# Altium PCB VoltageIndicator_V3.PcbDoc
Units mm, origin at the board's own origin, x right, y up, seen from the top; angles counter-clockwise.
Board outline 100 x 58.17 mm, 2 copper layers (Top Layer, Bottom Layer); 59 components, 37 nets, 147 pads, 15 vias.
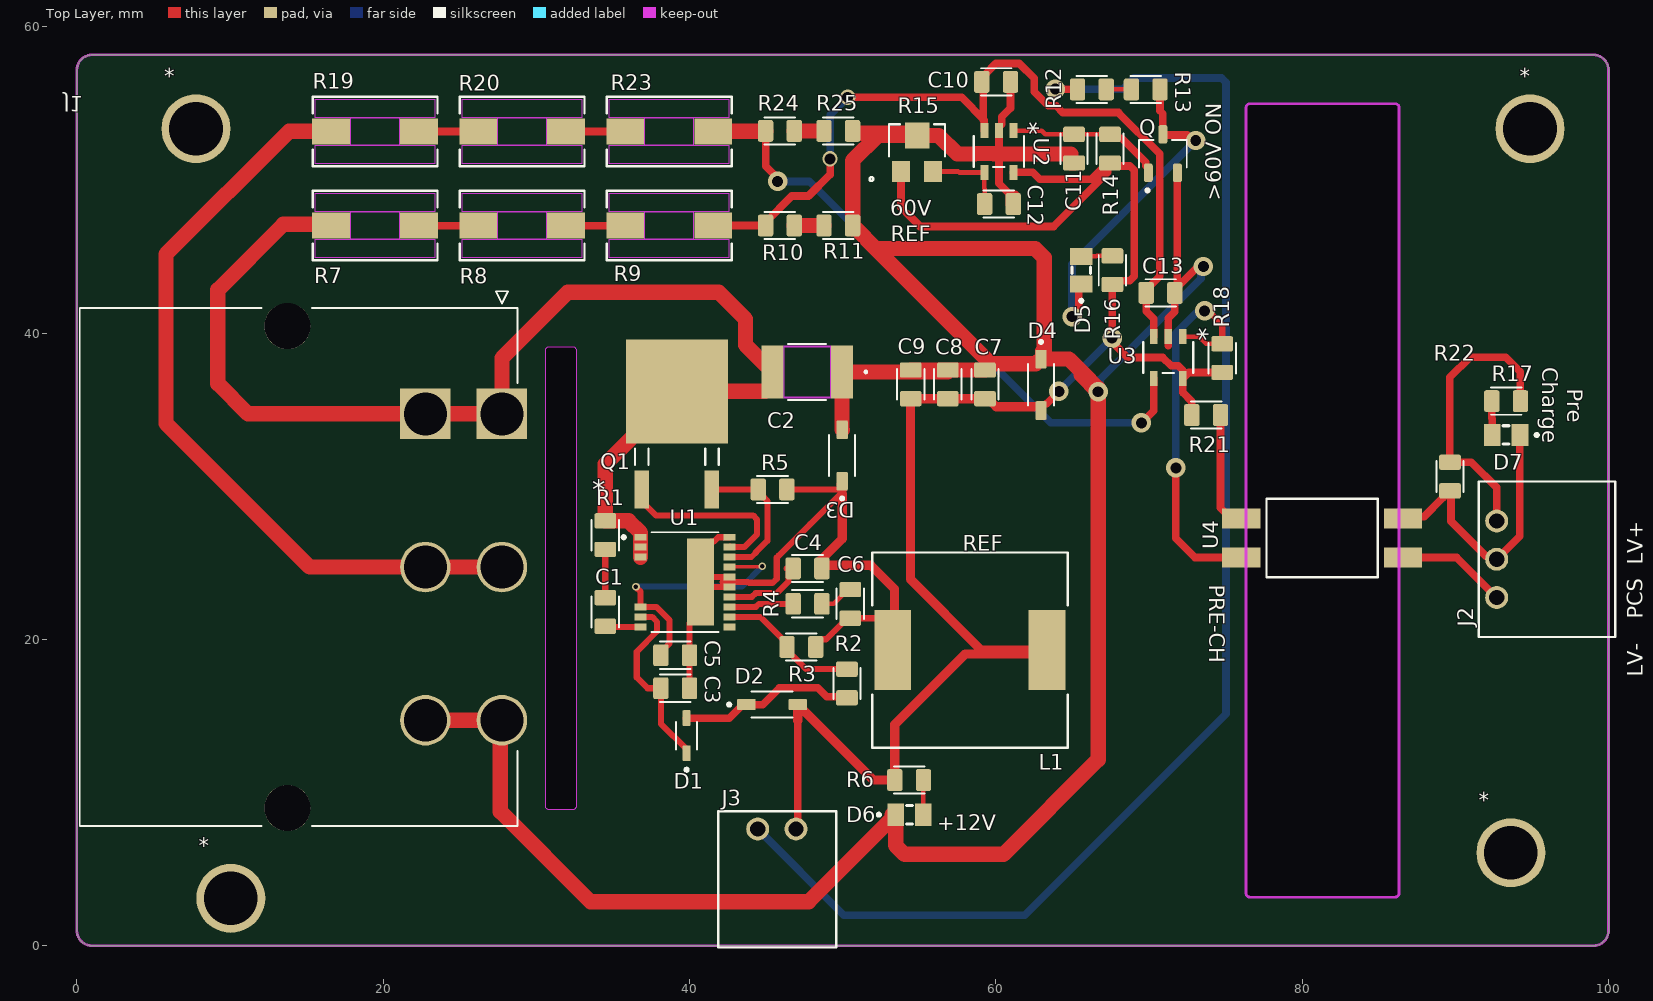
[diagram p0: Top Layer view]
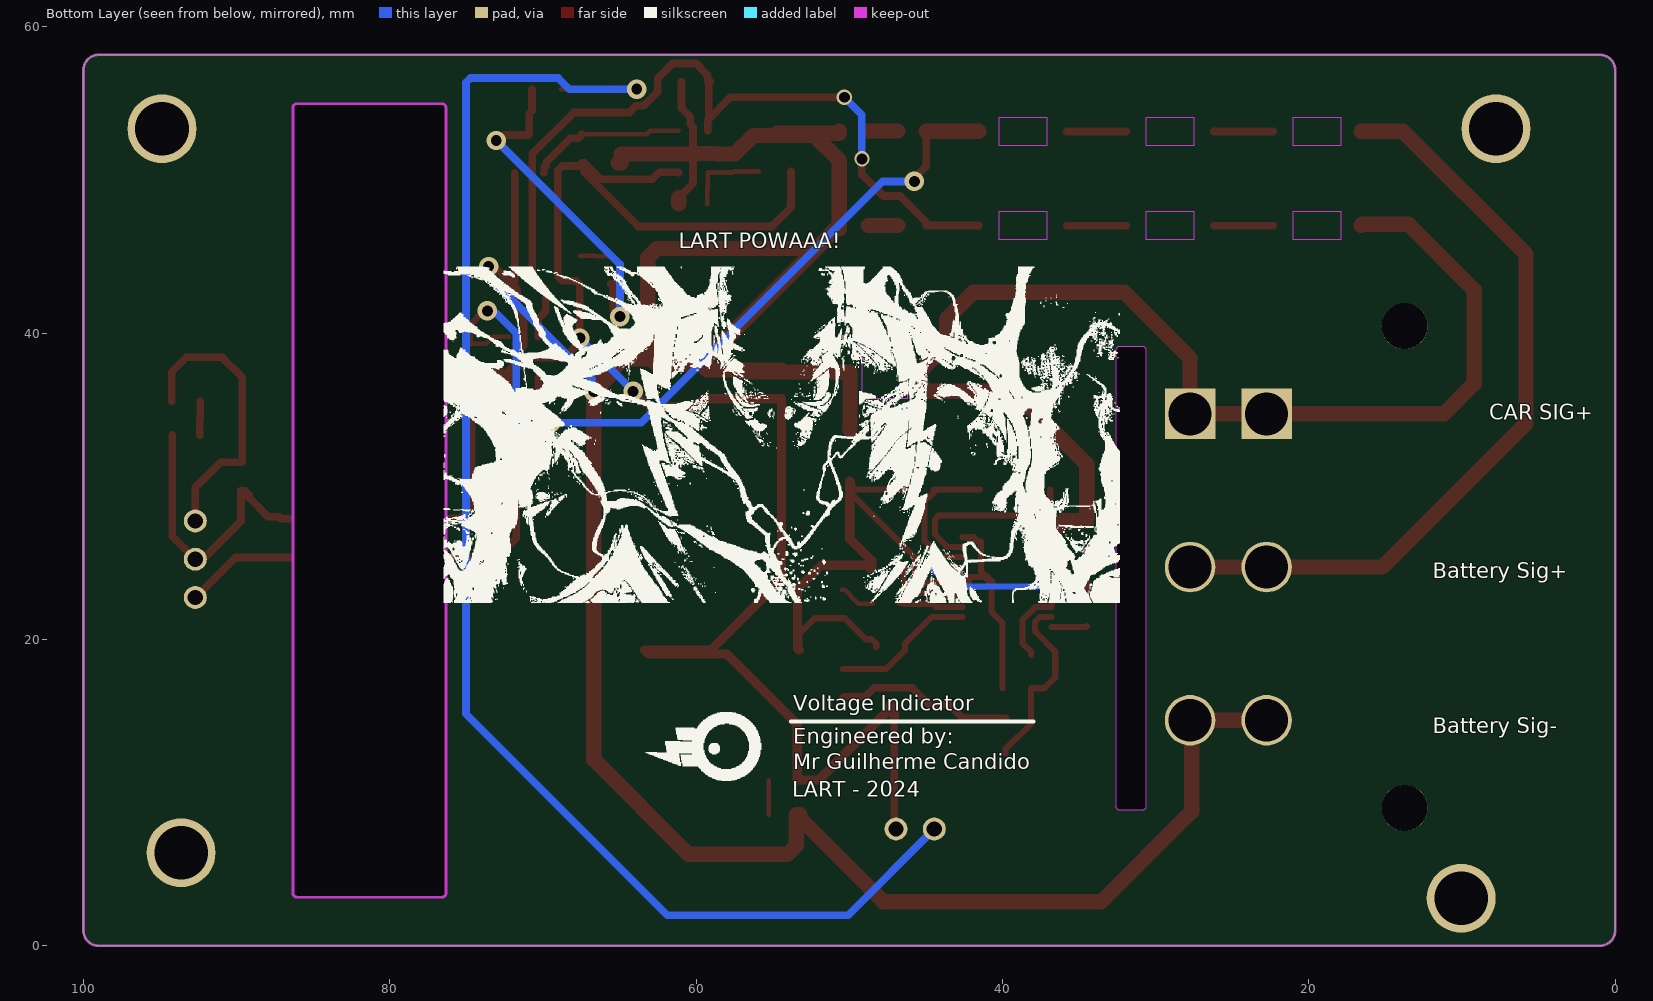
[diagram p1: Bottom Layer view, seen from below]
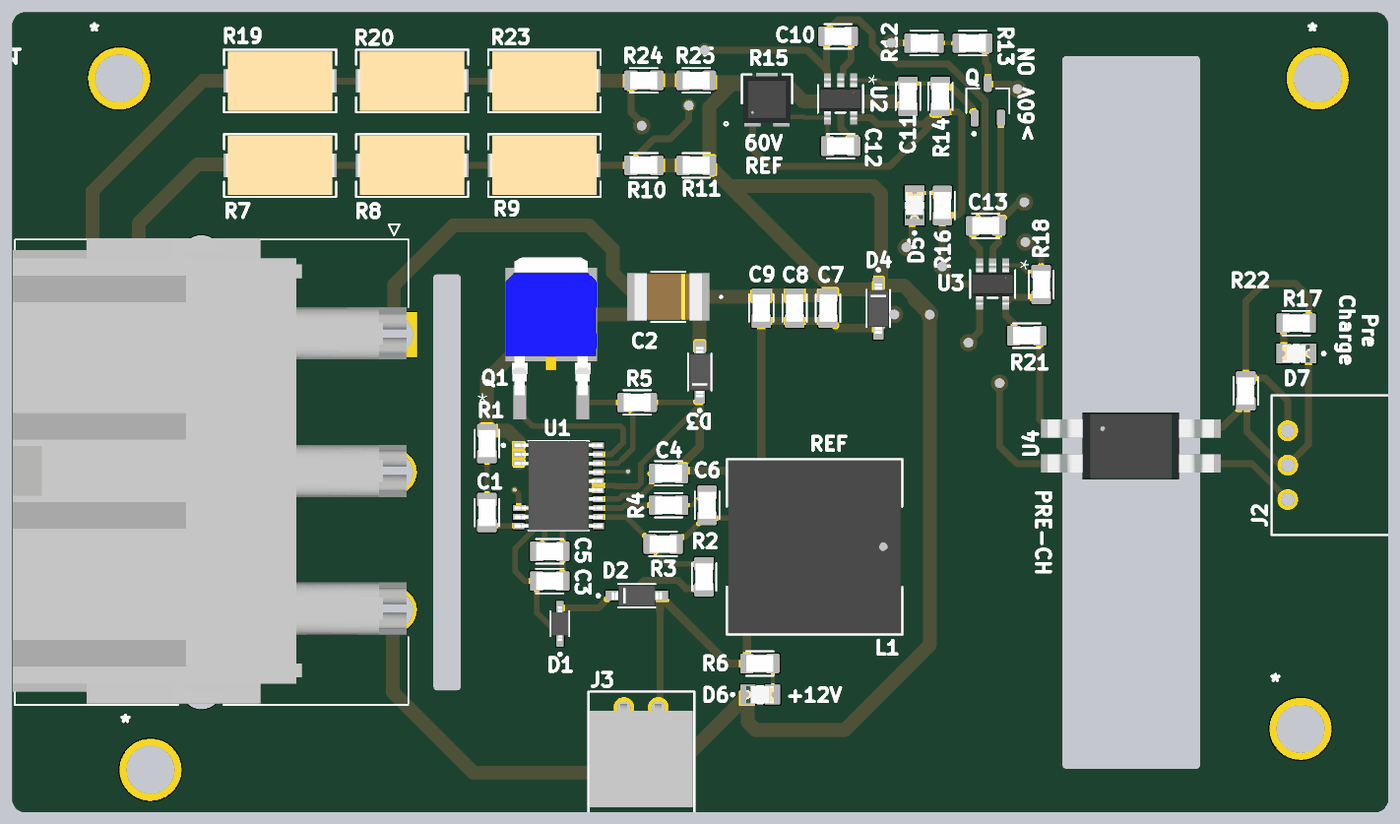
[diagram p2: 3D render of the assembled board from above, using the file's embedded part models]

## Layer stack, top to bottom
Top Solder: solder mask 0.0102, Solder Resist, Dk 3.5
Top Layer: signal copper 0.0356
Dielectric 1: dielectric 0.32, FR-4, Dk 4.8
Bottom Layer: signal copper 0.0356
Bottom Solder: solder mask 0.0102, Solder Resist, Dk 3.5

## Board outline
0,1 0,57.166 cw(c1,57.166) 1,58.166 99,58.166 cw(c99,57.166) 100,57.166 100,1 cw(c99,1) 99,0 1,0 cw(c1,1)
cut-out: 76.325,3.429 76.325,54.721 cw(c76.579,54.721) 76.579,54.975 86.071,54.975 cw(c86.071,54.721) 86.325,54.721 86.325,3.429 cw(c86.071,3.429) 86.071,3.175 76.579,3.175 cw(c76.579,3.429)
cut-out: 30.6,9.125 30.6,38.867 cw(c30.854,38.867) 30.854,39.121 32.346,39.121 cw(c32.346,38.867) 32.6,38.867 32.6,9.125 cw(c32.346,9.125) 32.346,8.871 30.854,8.871 cw(c30.854,9.125)

## Design rules (kind name [scope] priority, off if disabled: settings)
Clearance [All] p1: gap=0.2 ignorepadtopadclearanceinfootprint=TRUE
HoleSize [All] p1: absolutevalues=TRUE maxlimit=6.3 minlimit=0.3 maxpercent=80.000 minpercent=20.000
HoleToHoleClearance [All] p1: gap=0.5 allowstackedmicrovias=TRUE
PolygonConnect [All] p1: connectstyle=Relief reliefconductorwidth=0.254 reliefentries=4 polygonreliefangle="90 Angle" airgapwidth=0.254
RoutingVias [All] p1: holewidth=0.711 width=1.27 viastyle="Through Hole" minholewidth=0.3 minwidth=0.5 maxholewidth=6.3 maxwidth=10
SilkToSilkClearance [All] p1: silktosilkclearance=0
SolderMaskExpansion [All] p1: expansion=0.102 istentingtop=FALSE
UnRoutedNet [All] p1: checkbadconnections=TRUE
Width [All] p1: maxlimit=5 minlimit=0.127 preferedwidth=0.5 minimp=50.000000 maximp=50.000000 favimp=50.000000
26 further rules are at their usual default settings.

## Classes and differential pairs
component class "Pre-Charge Detector": C13 D7 R17 R18 R19 R20 R21 R22 R23 R24 R25 U3 U4
component class Connectors: J1 J2 J3
component class Buck: * C1 C2 C3 C4 C5 C6 C7 C8 C9 D1 D2 D3 D4 D6 L1 Q1 R1 R2 R3 R4 R5 R6 U1
component class 60V_Detector: C10 C11 C12 D5 Q R7 R8 R9 R10 R11 R12 R13 R14 R15 R16 U2

## Components (designator, comment, footprint, x,y, rotation, side; value= is the part's Value field where it differs from the comment)
* "M3 Mounting Hole" "M3 - Mounting Hole"#1 6.253,53.34 r0 top
* "M3 Mounting Hole" "M3 - Mounting Hole"#2 9.949,3.1 r0 top
* "M3 Mounting Hole" "M3 - Mounting Hole"#3 85,50.225 r0 top
* "M3 Mounting Hole" "M3 - Mounting Hole"#4 94.565,6.075 r0 top
C1 "10pF 630VDC" 0805 34.5,21.793 r270 top
C2 "0.1uF 630VDC" 1812 47.679,37.465 r180 top
C3 "10uF 25V" 0805 39.063,16.815 r0 top
C4 "0.1uF" 0805 47.703,24.638 r180 top
C5 "10uF 25V" 0805 39.063,18.974 r0 top
C6 "0.1uF" 0805 50.498,22.322 r90 top
C7 "47uF" 0805 59.287,36.652 r270 top
C8 "47uF" 0805 56.861,36.652 r270 top
C9 "47uF" 0805 54.435,36.652 r270 top
C10 "10uF" 0805 60.015,56.4 r180 top
C11 "10uF" 0805 65.1,52.04 r90 top
C12 "0805_Capacitor" 0805 60.2,48.425 r180 top
C13 "10uF" 0805 70.75,42.625 r180 top
D1 "CMDSH-3TR" SOD-323 39.805,13.716 r90 top
D2 "US1KFA" SOD123 45.389,15.748 r0 top
D3 "US1KFA" SOD123 49.965,32.004 r90 top
D4 "13V" SOD123 62.944,36.627 r270 top
D5 "LED 0805" "LED 0805" 65.573,44.109 r90 top
D6 "LED 0805" "LED 0805" 54.359,8.56 r0 top
D7 "LED 0805" "LED 0805" 93.309,33.35 r180 top
J1 "Molex 42820-3213" MOLEX_428203213 27.75,34.725 r90 top
J2 "S3B-XH-A(LF)(SN)" "3P JST XH2.54mm 90º" 92.695,27.737 r270 top
J3 "S2B-XH-A-1(LF)(SN)" "2P JST XH2.54mm 90º" 44.45,7.625 r0 top
L1 "7447709102 - WURTH" "7447709102 - WURTH" 58.309,19.304 r180 top
Q "N-MOS" AO3402 70.9,51.72 r90 top
Q1 "N-MOS" "DPAK - MOSFET" 39.17,36.195 r0 top
R1 "10k" 0805 34.5,26.81 r270 top
R2 "21.5k" 0805 50.275,17.125 r270 top
R3 "2.49k" 0805 47.303,19.507 r0 top
R4 "22.1k" 0805 47.703,22.327 r0 top
R5 "220mR" 0805 45.418,29.794 r180 top
R6 "10k" 0805 54.334,10.82 r180 top
R7 "SMV1W390KJT" SMV1W390KJT 19.468,47.02 r180 top
R8 "SMV1W390KJT" SMV1W390KJT 29.069,47.02 r180 top
R9 "SMV1W390KJT" SMV1W390KJT 38.67,47.019 r180 top
R10 "10K" 0805 45.9,47.025 r0 top
R11 "10K" 0805 49.71,47.025 r0 top
R12 "10K" 0805 66.267,55.91 r180 top
R13 "10K" 0805 69.782,55.91 r180 top
R14 "10K" 0805 67.45,52.04 r270 top
R15 "3203X502P" 3203X103P 54.85,51.805 r0 top
R16 "10k" 0805 67.605,44.109 r270 top
R17 "10k" 0805 93.309,35.56 r0 top
R18 "10K" 0805 74.775,38.365 r270 top
R19 "SMV1W390KJT" SMV1W390KJT 19.468,53.158 r180 top
R20 "SMV1W390KJT" SMV1W390KJT 29.069,53.158 r180 top
R21 "10K" 0805 73.725,34.65 r180 top
R22 "0805_Resistor" 0805 89.647,30.637 r90 top
R23 "SMV1W390KJT" SMV1W390KJT 38.67,53.158 r180 top
R24 "10K" 0805 45.9,53.2 r0 top
R25 "10K" 0805 49.71,53.2 r0 top
U1 "My_LT8316" IC_LT8316EFE#PBF 39.703,23.749 r0 top
U2 "MIC6270YM5-TR" MIC6270 60.2,51.85 r270 top
U3 "MIC6270YM5-TR" MIC6270 71.25,38.4 r270 top
U4 "VO617A-3X018T" VO617A 81.3,26.625 r0 top

## Footprints (in the part's own frame and the unit in brackets; to place one, negate y for a bottom-side part, rotate by r counter-clockwise, add the part's x,y. Pads: shape width x height; smd on the part's side, far side on the other; paste and mask are expansions set on the pad)
"2P JST XH2.54mm 90º" [mil]
  round 59 / inner round 60 / far side round 59 hole 39 paste-99999 mask+0: 1(0,0) 2(98.43,0)
  silkscreen extent -101,-304 202,46, body extent -98,-285 197,10, height 236
"3P JST XH2.54mm 90º" [mil]
  round 59 / inner round 60 / far side round 59 hole 39 paste-99999 mask+0: 1(0,0) 2(98.43,0) 3(196.86,0)
  silkscreen extent -101,-46 298,304, body extent -98,-10 295,285, height 236
0805 [mm]
  rrect25% 1x1.42 smd: 1(-0.935,0) 2(0.935,0)
  silkscreen extent -1,-0.89 1,0.89, body extent -1,-0.63 1,0.63, height 0.6
1812 [mil]
  rect 57x136 smd paste+0 mask+0: 1(-89.5,0) 2(89.5,0)
  Top Layer keep-out region: -59,-65 -59,65 59,65 59,-65
  Keep-Out Layer region: -59,-67 -59,67 59,67 59,-67
  silkscreen extent -154,-72 49,72, body extent -96,-67 96,67, height 86
3203X103P [mil]
  rect 47x55 smd paste+0 mask+0: 1(-41.34,-49.4) 2(41.34,-49.4)
  rect 63x67 smd paste+0 mask+0: 3(0,43.4)
  silkscreen extent -122,-74 72,72, body extent -67,-69 67,69, height 81
"7447709102 - WURTH" [mil] "1000uH - 900mA"
  rect 95x205 smd paste+0 mask+0: 1(-198.5,0) 2(198.5,0)
  silkscreen extent -251,-251 251,251, body extent -246,-246 246,246, height 394
AO3402 [mm]
  rrect50% 1.21x0.59 smd: 1(-1.255,0.95) 2(-1.255,-0.95) 3(1.255,0)
  silkscreen extent -2.5,-1.56 0.9,1.56
"DPAK - MOSFET" [mil]
  rect 37x98 smd paste+0 mask+0: 1(-90.16,-252) 2(90.16,-252)
  rect 262x268 smd paste+0 mask+0: 3(0,0)
  silkscreen extent -108,-189 108,-147, body extent -130,-231 130,163, height 93
IC_LT8316EFE#PBF [mm]
  rect 0.8x0.45 smd: 1(-2.9,2.925) 2(-2.9,2.275) 3(-2.9,1.625) 8(-2.9,-1.625) 9(-2.9,-2.275) 10(-2.9,-2.925) 11(2.9,-2.925) 12(2.9,-2.275) 13(2.9,-1.625) 14(2.9,-0.975) 15(2.9,-0.325) 16(2.9,0.325) 17(2.9,0.975) 18(2.9,1.625) 19(2.9,2.275) 20(2.9,2.925)
  rect 1.78x5.68 smd paste-4: 21(1.016,0)
  silkscreen extent -4.1,-3.25 2.2,3.25, body extent -3.2,-3.25 3.2,3.25, height 1.19
"LED 0805" [mm]
  rect 1.1x1.45 smd: A(0.9,0) C(-0.9,0)
  silkscreen extent -2.1,-0.6 0.2,0.6, body extent -1,-0.63 1,0.63, height 0.7
"M3 - Mounting Hole"#1 [mm]
  round 4.5 / inner round 1.524 / far side round 4.5 hole 3.5: 1(1.524,0)
"M3 - Mounting Hole"#2 [mm]
  round 4.5 / inner round 1.524 / far side round 4.5 hole 3.5: 1(0.101,0)
"M3 - Mounting Hole"#3 [mm]
  round 4.5 / inner round 1.524 / far side round 4.5 hole 3.5: 1(9.869,3.115)
"M3 - Mounting Hole"#4 [mm]
  round 4.5 / inner round 1.524 / far side round 4.5 hole 3.5: 1(-0.94,0)
MIC6270 [mil]
  rect 38.5x20 smd paste+0 mask+0: 1(-53.75,37.4) 2(-53.75,0) 3(-53.75,-37.4) 4(53.75,-37.4) 5(53.75,37.4)
  silkscreen extent -39,-65 40,64, body extent -59,-59 59,59, height 51
MOLEX_428203213 [mm]
  rect 3.3x3.3 / inner round 3.3 / far side rect 3.3x3.3 hole 2.8 mask+0.076: P1_1(0,0) P1_2(0,5)
  round 3.3 hole 2.8 mask+0.076: P2_1(-10,0) P2_2(-10,5) P3_1(-20,0) P3_2(-20,5)
  round 3 hole 3 unplated mask+0.076: ""(-25.73,14) ""(5.73,14)
  silkscreen extent -26.91,-1.03 8.01,27.56, body extent -26.82,-0.9 7,27.7, height 14.12
SMV1W390KJT [mil]
  rect 97x67 smd paste+0 mask+0: 1(-113,0) 2(113,0)
  Top Layer keep-out region: -153.5,-82.5 -153.5,-35.5 153.5,-35.5 153.5,-82.5
  Top Layer keep-out region: -153.5,35.5 -153.5,82.5 153.5,82.5 153.5,35.5
  Top Layer keep-out region: -62.5,-35.5 -62.5,35.5 62.5,35.5 62.5,-35.5
  Keep-Out Layer region: -62.5,-35.5 -62.5,35.5 62.5,35.5 62.5,-35.5
  silkscreen extent -160,-90 161,89, body extent -156,-84 156,84, height 152
SOD123 [mm]
  rrect18% 1.21x0.73 smd: 1(1.68,0) 2(-1.68,0)
  silkscreen extent -2.9,-0.85 1.35,0.85, body extent -1.83,-0.77 1.83,0.77, height 1.45
SOD-323 [mm]
  rrect25% 1.03x0.52 smd: A(1.15,0) C(-1.15,0)
  silkscreen extent -2.32,-0.68 0.9,0.68, body extent -1.24,-0.62 1.24,0.62, height 1.09
VO617A [mil]
  rect 98.43x52 smd paste+0 mask+0: 1(-208,50) 2(-208,-50) 3(208,-50) 4(208,50)
  silkscreen extent -143,-101 143,101, body extent -238,-96 238,96, height 163

## Part data
C1 C3 C4 C5 C6 C7 C8 C9 C10 C11 C13: library part 0805_Capacitor, Package="0805 AVX", Availability="In Stock", Check_prices=https://www.snapeda.com/parts/LD051A121KAB2A/AVX/view-part/?ref=eda, MF=AVX, MP=LD051A121KAB2A, Price=None, Purchase-URL=https://pricing.snapeda.com/search/part/LD051A121KAB2A/?ref=eda, SnapEDA_Link=https://www.snapeda.com/parts/LD051A121KAB2A/AVX/view-part/?ref=snap
C2: library part 1812_Capacitor, Package="0805 AVX", Availability="In Stock", Check_prices=https://www.snapeda.com/parts/LD051A121KAB2A/AVX/view-part/?ref=eda, MF=AVX, MP=LD051A121KAB2A, Price=None, Purchase-URL=https://pricing.snapeda.com/search/part/LD051A121KAB2A/?ref=eda, SnapEDA_Link=https://www.snapeda.com/parts/LD051A121KAB2A/AVX/view-part/?ref=snap
C12: Package="0805 AVX", Availability="In Stock", Check_prices=https://www.snapeda.com/parts/LD051A121KAB2A/AVX/view-part/?ref=eda, MF=AVX, MP=LD051A121KAB2A, Price=None, Purchase-URL=https://pricing.snapeda.com/search/part/LD051A121KAB2A/?ref=eda, SnapEDA_Link=https://www.snapeda.com/parts/LD051A121KAB2A/AVX/view-part/?ref=snap
D1: "Diode Schottky 30V 100mA Surface Mount SOD-323", Package="SOD-323 Central Semiconductor", Availability=Unavailable, MF="Central Semiconductor", MP="CMDSH-3 TR", Price=None, SnapEDA_Link=https://www.snapeda.com/parts/CMDSH-3%20TR/Central%20Semiconductor%20Corp/view-part/447234/?ref=snap
D2 D3: library part "SOD123 - Rectifier Diode", Package="SOD-123 Fairchild Semiconductor", Availability="In Stock", Check_prices=https://www.snapeda.com/parts/1N4148W-7-F/Diodes+Inc./view-part/?ref=eda, MF="Diodes Inc.", MP=1N4148W-7-F, Price=None, Purchase-URL=https://pricing.snapeda.com/search/part/1N4148W-7-F/?ref=eda, SnapEDA_Link=https://www.snapeda.com/parts/1N4148W-7-F/Diodes+Inc./view-part/?ref=snap
D4: library part "SOD123 - Zener Diode", Package="SMA-2 Taiwan Semiconductor", Availability="In Stock", Check_prices=https://www.snapeda.com/parts/1SMA5926/Taiwan+Semiconductor/view-part/?ref=eda, MF="Taiwan Semiconductor", MP=1SMA5926, Price=None, Purchase-URL=https://pricing.snapeda.com/search/part/1SMA5926/?ref=eda, SnapEDA_Link=https://www.snapeda.com/parts/1SMA5926/Taiwan+Semiconductor/view-part/?ref=snap
D5 D6 D7: "LED Uni-Color Green 4-Pin Chip 0805 T/R", Package=None, Availability=Unavailable, MP=597-3305-607F, Price=None
J1: Package=None, Availability=Unavailable, MP=428203213, Price=None
J2: library part "3P JST XH2.54mm 90º", "No Description Available", Mfr_Name=JST, Copyright="Copyright (C) 2024 Ultra Librarian. All rights reserved.", Manufacturer_Part_Number=S3B-XH-A(LF)(SN), RefDes=RefDes, Type=DEV
J3: library part "2P JST XH2.54mm 90º", "No Description Available", Mfr_Name=JST, Copyright="Copyright (C) 2024 Ultra Librarian. All rights reserved.", Manufacturer_Part_Number=S2B-XH-A-1(LF)(SN), RefDes=RefDes, Type=DEV
L1: "1000uH - 900mA", Package="Nonstandard Bourns", Digi-Key_Part_Number=SRR1260-680MCT-ND, Digi-Key_Purchase_URL=https://www.digikey.com/product-detail/en/bourns-inc/SRR1260-680M/SRR1260-680MCT-ND/2127423?utm_source=snapeda&utm_medium=aggregator&utm_campaign=symbol, MF=Bourns, MP=SRR1260-680M, SnapEDA_Link=https://www.snapeda.com/parts/SRR1260-680M/Bourns/view-part/337191/?ref=snap
Q Q1: "D-PAK", Package="SOT-23 Alpha &amp; Omega Semiconductor", Digi-Key_Part_Number=785-1002-1-ND, Digi-Key_Purchase_URL=https://www.digikey.ca/product-detail/en/alpha-omega-semiconductor-inc/AO3402/785-1002-1-ND/1855944?utm_source=snapeda&utm_medium=aggregator&utm_campaign=symbol, MF="Alpha &", MP=AO3402, SnapEDA_Link=https://www.snapeda.com/parts/AO3402/Alpha%20&%20Omega%20Semiconductor%20Inc./view-part/564857/?ref=snap
R1 R2 R3 R4 R5 R6 R10 R11 R12 R13 R14 R16 R17 R18 R21 R24 R25: library part 0805_Resistor, Package=0805, Power_Rating=".25 W", Resistance=.33, Tolerance=1%, Availability="In Stock", Check_prices=https://www.snapeda.com/parts/2-2176053-0/TE+Connectivity/view-part/?ref=eda, EU_RoHS_Compliance="Compliant with Exemptions", MF="TE Connectivity", MP=2-2176053-0, Price=None, SnapEDA_Link=https://www.snapeda.com/parts/2-2176053-0/TE+Connectivity/view-part/?ref=snap
R7 R8 R9 R19 R20 R22 R23: Package=0805, Power_Rating=".25 W", Resistance=.33, Tolerance=1%, Availability="In Stock", Check_prices=https://www.snapeda.com/parts/2-2176053-0/TE+Connectivity/view-part/?ref=eda, EU_RoHS_Compliance="Compliant with Exemptions", MF="TE Connectivity", MP=2-2176053-0, Price=None, SnapEDA_Link=https://www.snapeda.com/parts/2-2176053-0/TE+Connectivity/view-part/?ref=snap
R15: library part 3203X103P, "No Description Available", Mfr_Name="TE Connectivity", Copyright="Copyright (C) 2024 Ultra Librarian. All rights reserved.", Manufacturer_Part_Number=3203X502P, RefDes=RefDes, Type=DEV
U2 U3: "No Description Available", Mfr_Name=Microchip, Copyright="Copyright (C) 2024 Ultra Librarian. All rights reserved.", Manufacturer_Part_Number=MIC6270YM5-TR, RefDes=RefDes, Type=DEV
U4: library part VO617A, "VO617A-3X018T Optocoupler Dc-in 1-CH Transistor Dc-out 4-PIN PDIP SMD T/r", NexarPartId=68099910, Number of Channels=1

## Via types
v1: diameter 1.27, hole 0.711, Top Layer to Bottom Layer, tented both sides, 11 vias
v2: diameter 1, hole 0.711, Top Layer to Bottom Layer, tented both sides, 2 vias
v3: diameter 0.5, hole 0.3, Top Layer to Bottom Layer, tented both sides, 2 vias

## Nets (pads, with @x,y where several pads share a name; then routed paths per layer and width w, separated by ;. In a path a pad name is that pad's centre, name@x,y a point inside that pad or via, vN(x,y) a via of type N, cw(c..) or ccw(c..) an arc to the next point about the centre after c; other vN are vias at no path point)
+12: C7.2 C8.2 C9.2 D2.1 D4.1 J3.2 L1.1 R6.2 R14.2 R15.1 R16.2 R18.2 R21.2 U2.5 U3.5 | length 121.3
  Top Layer w0.3: D4.1 62.944,35.187 63.159,35.402 63.316,35.402
  Top Layer w0.5: J3.2 47.069,7.744 47.069,14.706 ; R15.1 53.8,48.209 55.045,46.965 63.779,46.965 67.31,50.495 R14.2@67.31,51.105 ; U2.5 61.15,50.495 62.408,50.495 62.865,50.038 66.243,50.038 R14.2@67.31,51.105 ; 63.316,35.402 v1(64.11,36.195) ; R21.2 72.79,35.535 72.2,36.125 U3.5 ; R18.2 72.595,37.43 U3.5 ; R14.2@67.31,51.105 R14.2 67.64,50.915 68.732,50.915 69.025,50.622 69.025,43.717 68.732,43.424 67.855,43.424 R16.2 67.589,43.174 v1(67.589,39.675) 67.589,39.421 68.605,38.405 70.901,38.405 71.448,37.858 71.907,37.858 72.2,37.566 U3.5
  Top Layer w0.6: 47.069,14.706 D2.1 47.309,15.748 47.374,15.683 47.374,15.443 51.997,10.82 R6.2 53.399,14.449 58,19.05 63.097,19.05 L1.1 59.046,19.304 54.425,23.925 54.425,35.717 C9.2 C8.2 C7.2 59.497,35.717 60.027,35.187 62.879,35.187 62.944,35.122 D4.1
  Bottom Layer w0.5: v1(64.11,36.195) v1(67.589,39.675)
GND: C2.1 C7.1 C8.1 C9.1 C10.1 C11.1 C12.1 C13.1 D3.1 D4.2 D6.C J1.P3_1 J1.P3_2 Q.2 R11.2 R15.3 R25.2 U2.2 U3.2 | length 198.7
  Top Layer w0.5: C10.1 60.95,54.675 60.392,54.117 60.392,53.642 60.2,53.45 U2.2 60.2,51.689 60.2,49.775 60.885,49.09 60.885,48.885 60.93,48.84 C12.1@61.135,48.84 ; 71.25,39.174 U3.2 71.25,40.97 71.685,41.405 C13.1 71.85,42.79 C13.1@71.85,43 ; C13.1@71.685,42.835 C13.1@71.85,43 ; Q.2 C13.1@71.85,43 ; v1(73.55,44.35) 73.364,44.164 73.014,44.164 C13.1@71.85,43
  Top Layer w1: J1.P3_2 J1.P3_1 27.65,14.625 27.65,8.757 33.532,2.875 47.774,2.875 53.234,8.335 53.234,8.56 D6.C 53.459,8.385 53.409,8.335 53.459,8.335 53.459,6.561 54.045,5.975 60.5,5.975 66.675,12.15 66.675,32.575 66.675,32.969 66.675,36.4 65.673,37.402 64.768,38.307 62.974,38.307 D4.2 63.049,38.412 63.049,38.827 63.15,38.928 63.15,44.939 62.564,45.525 54.012,45.525 52.145,45.525 ; D3.1 49.958,33.69 49.958,37.459 C2.1 54.435,37.465 C8.1@56.861,37.465 ; R25.2 50.645,53.053 54.704,53.053 R15.3 ; C9.1 C8.1 C7.1 59.7,38 62.607,38 D4.2@62.809,38.202 ; 59.363,38.307 52.145,45.525 ; C12.1 C12.1@61.135,48.84 ; C11.1 64.897,51.105 64.897,51.689 60.2,51.689 59.855,51.689 59.816,51.728 58.684,51.728 58.645,51.689 57.48,51.689 56.262,52.907 R15.3 ; 65.557,37.287 v1(66.675,36.17) ; 52.145,45.525 50.855,46.815 50.645,46.815 R11.2 50.645,51.257 52.295,52.907 R15.3
  Bottom Layer w0.5: v1(66.675,36.17) 66.802,36.297 66.802,36.977 73.395,43.57 73.395,44.195 v1(73.55,44.35)
INTVCC: C5.1 U1.8 U1.17 | length 17.2
  Top Layer w0.254: U1.17 42.629,24.75 44.725,24.75 v3(44.75,24.775)
  Top Layer w0.4: v3(36.5,23.45) 36.5,23.423 36.803,23.12 U1.8 37.826,22.124 38.7,21.25 38.7,19.755 38.128,19.184 C5.1
  Bottom Layer w0.4: v3(36.5,23.45) 43.425,23.45 v3(44.75,24.775)
"LV GND": J2.3 U4.3 | length 7.2
  Top Layer w0.5: U4.3@86.578,25.347 90.085,25.347 J2.3
NetC1_1: C1.1 R1.2 | length 3.1
  Top Layer w0.4: C1.1 R1.2
NetC1_2: C1.2 U1.10 | length 2.3
  Top Layer w0.4: C1.2 34.534,20.824 U1.10
NetC2_2: C2.2 J1.P1_1 J1.P1_2 Q1.3 R1.1 R7.2 U1.1 U1.2 U1.3 | length 82.8
  Top Layer w1: R7.2 16.517,47.1 13.475,47.1 9.2,42.825 9.2,36.7 11.175,34.725 J1.P1_2 J1.P1_1 27.75,38.375 32.05,42.675 41.9,42.675 43.65,40.925 43.65,39.22 C2.2 45.405,36.669 44.932,36.195 Q1.3 39.17,36.119 34.5,31.449 R1.1 36.03,27.745 36.803,26.972 U1.2 U1.3
NetC3_1: C3.1 D1.C U1.9 | length 12.2
  Top Layer w0.4: U1.9 37.551,21.474 37.876,21.149 37.876,20.526 36.551,19.201 36.551,17.524 37.26,16.815 C3.1 38.128,14.497 39.805,12.821 D1.C
NetC3_2: C3.2 C4.1 C5.2 C6.1 D3.2 L1.2 R3.2 R5.1 U1.15 U1.16 U1.20 U1.21 | length 57.3
  Top Layer w0.3: U1.16 42.15,24.074 42.15,23.75 43.806,23.75 45.415,23.75 45.689,24.024
  Top Layer w0.4: C3.2 C5.2 39.998,21.078 40.719,21.799 U1.21 41.044,23.424 U1.15 ; 42.15,23.75 43.806,23.75 43.877,23.679 45.416,23.679 45.689,23.952 45.689,25.339 45.814,25.463 47.883,27.532 49.965,29.614 ; U1.16 41.044,24.074 41.409,24.439 41.409,26.389 41.589,26.389 41.874,26.674 U1.20 ; R5.1 D3.2@49.675,29.794 ; R3.2 48.238,19.717 48.538,20.017 48.919,20.017 50.288,21.387 C6.1 52.26,21.387 53.267,20.38 L1.2 ; D3.2@49.8,29.849 49.8,30.159 D3.2
  Top Layer w0.5: U1.21 U1.21@41.044,24.074
  Top Layer w0.6: C4.1 48.538,24.738 48.538,25.148 49.965,26.575 49.965,29.518 ; C4.1@48.638,24.848 51.827,24.848 53.375,23.3 53.375,19.412 L1.2 ; D3.2@49.965,29.794 D3.2
NetC4_2: C4.2 U1.14 | length 5.7
  Top Layer w0.3: C4.2@46.368,24.638 C4.2
  Top Layer w0.4: U1.14 42.611,22.782 44.065,22.782 44.308,23.025 45.687,23.025 46.468,23.805 46.468,24.338 C4.2 ; C4.2@46.343,24.638 C4.2@46.368,24.638
NetC6_2: C6.2 R4.2 | length 2.5
  Top Layer w0.3: R4.2@48.463,22.327 R4.2 49.413,22.327 49.938,22.852 49.938,22.907 50.288,23.257 C6.2
NetC10_2: C10.2 C13.2 R9.1 R10.1 U2.3 U3.3 | length 55
  Top Layer w0.5: R9.1@41.571,47.05 R9.1 41.546,47.025 R10.1@44.831,47.025 ; R10.1 44.965,47.235 46.68,48.95 47.766,48.95 49.175,50.359 v2(49.175,51.375) ; v2(50.325,55.4) 57.757,55.4 59.25,53.907 U2.3 ; C10.2 59.165,56.315 59.165,53.907 ; C10.2@59.25,56.4 59.25,56.845 59.315,56.845 59.33,56.86 59.33,56.925 60.005,57.6 61.523,57.6 62.494,56.629 62.494,55.771 63.426,54.84 63.935,54.84 64.375,54.4 68.003,54.4 70.701,51.701 70.701,43.711 69.815,42.824 C13.2 69.815,41.43 70.3,40.945 U3.3
  Bottom Layer w0.5: v2(49.175,51.375) 49.175,54.25 v2(50.325,55.4)
NetC11_2: C11.2 Q.1 R14.1 U2.1 | length 10.3
  Top Layer w0.3: U2.1 62.992,53.215 63.232,52.975 C11.2 R14.1
  Top Layer w0.5: R14.1 67.7,52.725 68.225,52.725 69.792,51.158 69.792,50.933 69.905,50.82 69.905,50.51 Q.1
NetC12_2: C12.2 R15.2 U2.4 | length 5.4
  Top Layer w0.3: R15.2 57.531,50.55 57.596,50.485 U2.4 59.25,49.443 59.265,49.428 C12.2
NetD1_A: D1.A D2.2 R2.2 | length 12.1
  Top Layer w0.3: R2.2@50.065,16.19 R2.2 R2.2@50.425,16.19
  Top Layer w0.5: D1.A 42.587,14.866 43.469,15.748 D2.2 44.773,15.748 45.875,16.85 48.374,16.85 48.965,16.259 50.356,16.259 R2.2@50.425,16.19
NetD5_A: D5.A R16.1 | length 2
  Top Layer w0.3: D5.A 66.548,45.009 66.583,45.044 R16.1
NetD5_C: D5.C Q.3 R13.1 | length 22.7
  Top Layer w0.5: v1(64.973,41.072) 65.405,41.504 65.405,43.209 D5.C ; R13.1 70.717,54.514 70.9,54.331 Q.3 70.945,52.93 72.487,52.93 72.842,52.575 v1(73.05,52.575)
  Bottom Layer w0.5: v1(64.973,41.072) 64.973,44.498 v1(73.05,52.575)
NetD6_A: D6.A R6.1 | length 2.3
  Top Layer w0.3: D6.A 55.269,8.569 R6.1
NetD7_A: D7.A R17.1 | length 2.2
  Top Layer w0.5: R17.1 92.374,34.452 92.409,34.417 D7.A
NetD7_C: D7.C J2.2 R22.1 U4.4 | length 18.7
  Top Layer w0.5: U4.4@86.578,27.887 87.124,27.887 87.243,28.005 87.95,28.005 89.187,29.242 89.187,29.452 89.437,29.702 89.713,29.702 89.713,28.218 89.713,27.712 91.997,25.428 92.504,25.428 J2.2 94.209,26.751 D7.C
NetJ1_P2_1: J1.P2_1 J1.P2_2 R19.2 | length 51
  Top Layer w1: R19.2 16.58,53.175 13.85,53.175 5.825,45.15 5.825,34.1 15.2,24.725 J1.P2_2 J1.P2_1
NetJ2_1: J2.1 R17.2 R22.2 | length 18.9
  Top Layer w0.5: J2.1 92.695,29.921 91.044,31.572 R22.2 89.637,31.572 89.637,37.109 90.957,38.43 93.294,38.43 94.244,37.48 R17.2
NetJ3_1: J3.1 R12.2 | length 92.6
  Top Layer w0.5: v1(63.875,55.925) 63.883,55.917 65.324,55.917 R12.2
  Bottom Layer w0.5: J3.1 50.075,2 61.875,2 75.025,15.15 75.025,56.357 74.732,56.65 68.995,56.65 68.27,55.925 v1(63.875,55.925)
NetQ1_1: Q1.1 U1.19 | length 12
  Top Layer w0.4: Q1.1 36.88,29.019 37.804,28.096 44.145,28.096 44.4,27.841 44.4,26.85 43.574,26.024 U1.19 U1.19@42.632,26.053
NetQ1_2: Q1.2 R5.2 U1.18 | length 9.6
  Top Layer w0.35: 44,25.374 44.038,25.377 44.325,25.664
  Top Layer w0.4: Q1.2 44.325,29.794 R5.2 44.483,29.584 44.783,29.284 44.851,29.284 45.085,29.05 45.085,26.439 44.325,25.678 44.325,25.664 ; U1.18 44,25.374
NetR2_1: R2.1 R3.1 U1.12 | length 9.5
  Top Layer w0.4: U1.12 44.611,21.474 46.368,19.717 R3.1 46.368,19.297 47.605,18.06 R2.1 R2.1@50.425,18.06
NetR4_1: R4.1 U1.13 | length 4.2
  Top Layer w0.3: R4.1@46.368,22.327 R4.1
  Top Layer w0.4: U1.13 42.607,22.128 44.336,22.128 44.535,22.327 R4.1@46.368,22.327
NetR7_1: R7.1 R8.2 | length 3.9
  Top Layer w0.5: R7.1 R8.2
NetR8_1: R8.1 R9.2 | length 3.9
  Top Layer w0.5: R8.1@31.939,47.019 R9.2
NetR10_2: R10.2 R11.1 | length 1.9
  Top Layer w1: R10.2 R11.1
NetR12_1: R12.1 R13.2 | length 1.6
  Top Layer w0.3: R12.1 R13.2
NetR18_1: R18.1 U3.1 U4.2 | length 26.4
  Top Layer w0.3: U3.1 73.254,39.765 73.719,39.3 R18.1
  Top Layer w0.4: v1(73.625,41.45) 73.85,41.45 74.775,40.525 R18.1
  Top Layer w0.5: v1(71.75,31.2) 71.75,26.6 72.995,25.355 75.758,25.355 U4.2 ; U4.2@75.758,25.347 U4.2@76.012,25.347
  Bottom Layer w0.5: v1(71.75,31.2) 71.75,40 73.053,41.303 73.478,41.303 v1(73.625,41.45)
NetR19_1: R19.1 R20.2 | length 3.9
  Top Layer w0.5: R19.1 R20.2
NetR20_1: R20.1 R23.2 | length 3.9
  Top Layer w0.5: R20.1 R23.2
NetR21_1: R21.1 U4.1 | length 7.7
  Top Layer w0.5: R21.1 74.66,28.598 74.953,28.305 75.017,28.305 75.427,27.895 U4.1
NetR23_1: R23.1 R24.1 U3.4 | length 40.6
  Top Layer w0.5: R24.1 44.965,53.179 44.965,50.893 45.75,50.108 v1(45.75,49.9) ; v1(69.494,34.138) 70.3,34.943 U3.4
  Top Layer w1: R23.1 41.562,53.179 R24.1@44.965,53.179
  Bottom Layer w0.5: v1(45.75,49.9) 47.825,49.9 63.587,34.138 v1(69.494,34.138)
NetR24_2: R24.2 R25.1 | length 1.9
  Top Layer w1: R24.2 R25.1
pads on no net: *.1 J1. U1.11

## Keep-outs
Keep-Out Layer:
  lines w0.18: 0,1 ccw(c1,1) 1,0 99,0 ccw(c99,1) 100,1 100,57.166 ccw(c99,57.166) 99,58.166 1,58.166 ccw(c1,57.166) 0,57.166 0,1 ; 76.325,3.429 ccw(c76.579,3.429) 76.579,3.175 86.071,3.175 ccw(c86.071,3.429) 86.325,3.429 86.325,54.721 ccw(c86.071,54.721) 86.071,54.975 76.579,54.975 ccw(c76.579,54.721) 76.325,54.721 76.325,3.429

## Silkscreen, mask and mechanical layers (free items; w line width, h text height)
Top Overlay:
  text ">60V ON" at 74.7,48.65 h1 r90
  text "60V" at 53.1,47.675 h1
  text "REF" at 53.13,46.01 h1
  text "Charge" at 95.666,37.77 h1 r270
  text "Pre" at 97.317,36.373 h1 r270
  text "REF" at 57.839,25.806 h1
  text "LV+" at 102.217,24.892 h1 r90
  text "PRE-CH" at 73.925,23.575 h1 r270
  text "PCS" at 102.217,21.361 h1 r90
  text "LV-" at 102.217,17.577 h1 r90
  text "+12V" at 56.162,7.544 h1
Bottom Overlay:
  drawing of 1110 lines, arcs and shapes, not listed
  text "LART POWAAA!" at 61.125,45.55 h1
  text "CAR SIG+" at 8.221,34.329 h1
  text "Battery Sig+" at 11.896,23.987 h1
  text "Voltage Indicator" at 53.671,15.337 h1
  text "Battery Sig-" at 11.896,13.862 h1
  text "Engineered by:" at 53.671,13.187 h1
  text "Mr Guilherme Candido" at 53.671,11.529 h1
  text "LART - 2024" at 53.721,9.729 h1

## Text inside footprints (layer, text, board x,y; h text height)
J1: Mechanical 13 "PCB Edge" at 0.75,43.725 h1.27 r270
Q1: Top Overlay "*" at 33.637,29.159 h1.27; Mechanical 13 "*" at 36.562,32.766 h1.27
U2: Top Overlay "*" at 61.531,53.787 h1.27 r270; Mechanical 13 "*" at 60.439,52.79 h1.27 r270
U3: Top Overlay "*" at 72.581,40.337 h1.27 r270; Mechanical 13 "*" at 71.489,39.34 h1.27 r270
U4: Top Overlay "*" at 75.445,29.089 h0; Mechanical 13 "*" at 77.858,27.717 h0